# Altium PCB SZG-PMOD-TXR.PcbDoc (part 2 of 2)
Units mil, origin at the board's own origin, x right, y up, seen from the top; angles counter-clockwise.
Board outline 1968.5 x 2755.91 mil, 4 copper layers (L1-TOP, L2-GND, L3-PWR, L4-BOT), stack 59.85 mil thick; 72 components, 82 nets, 269 pads, 170 vias.
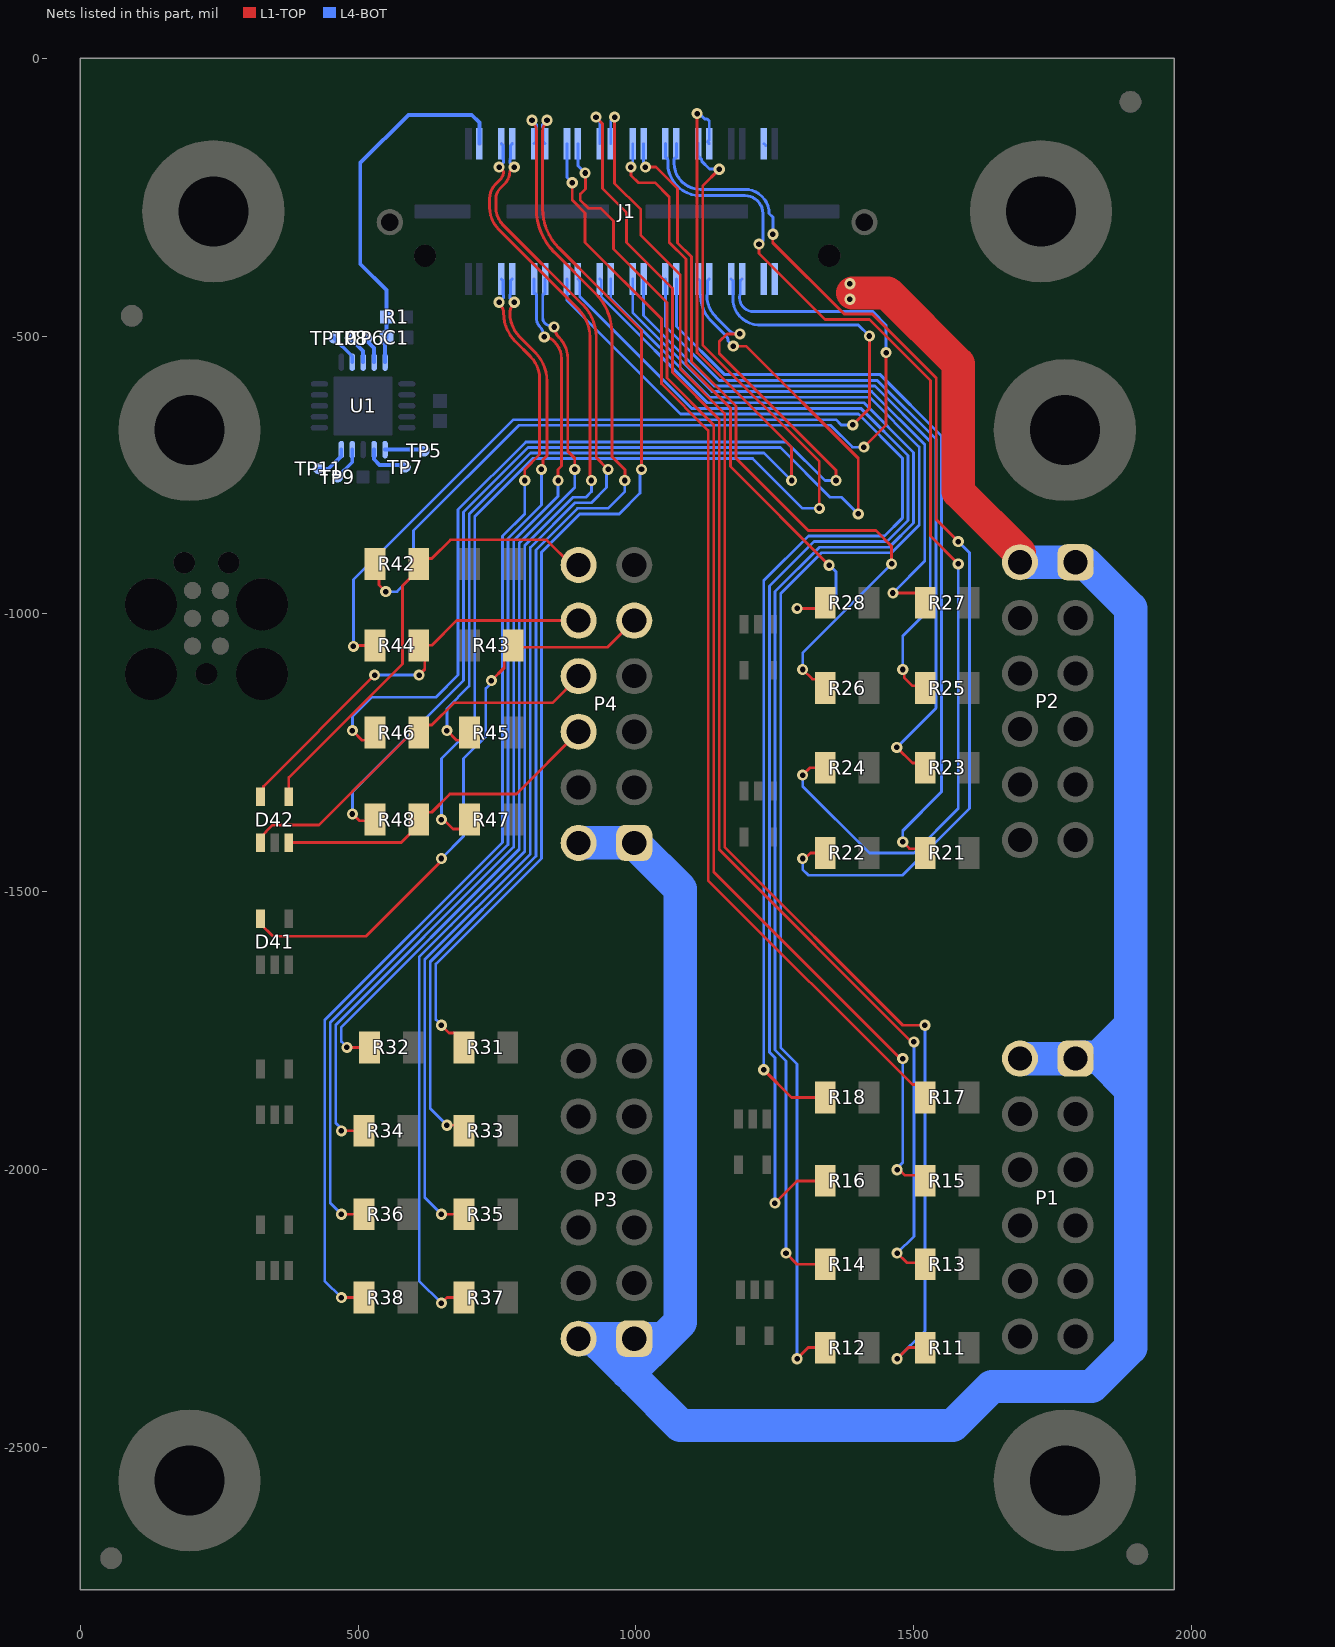
[diagram p4: the nets of this part, all layers, seen from the top]

## Via types
v1: diameter 20, hole 10, L1-TOP to L4-BOT, tented both sides, 170 vias

## Nets (pads, with @x,y where several pads share a name; then routed paths per layer and width w, separated by ;. In a path a pad name is that pad's centre, name@x,y a point inside that pad or via, vN(x,y) a via of type N, cw(c..) or ccw(c..) an arc to the next point about the centre after c; other vN are vias at no path point) (continued)
NetD41_5: D41.5 P4.9 R43.2 | length 1078.6
  L1-TOP w5: D41.5@324.41,-1548.66 324.41,-1557.52 346.89,-1580 514.06,-1580 650,-1444.06 v1(650,-1440) ; v1(740,-1120) 763.17,-1096.83 763.17,-1076.2 R43.2@779.37,-1060 ; R43.2@779.37,-1056.67 R43.2@779.37,-1060 ; P4.9@997,-1012 949,-1060 R43.2@779.37,-1060
  L4-BOT w5: v1(650,-1440) 690,-1400 690,-1260 730,-1220 730,-1134.06 740,-1124.06 v1(740,-1120)
NetD42_1: D42.1 P4.8 R46.1 | length 701.9
  L1-TOP w5: D42.1@324.41,-1411.34 324.41,-1402.48 334.63,-1392.26 334.63,-1391.5 346.13,-1380 430,-1380 586.1,-1223.9 598.8,-1223.9 R46.1@609.37,-1213.33 ; R46.1@610.83,-1214.8 625.57,-1200.06 632.64,-1200.06 672.7,-1160 850,-1160 897,-1113 P4.8@897,-1112
NetD42_3: D42.3 P4.6 R48.1 | length 608.9
  L1-TOP w5: D42.3@375.59,-1411.34 577.87,-1411.34 609.37,-1379.84 R48.1@609.37,-1370 ; R48.1@610.83,-1371.46 625.57,-1356.73 632.64,-1356.73 665.23,-1324.14 784.86,-1324.14 P4.6@897,-1212
NetD42_4: D42.4 P4.12 R42.1 | length 841.6
  L1-TOP w5: D42.4@375.59,-1328.66 375.59,-1294.41 580,-1090 580,-949.21 609.37,-919.84 609.37,-915.86 R42.1@609.37,-910 ; R42.1@610,-915.86 625.57,-900.29 632.64,-900.29 666.21,-866.72 839.18,-866.72 884.46,-912 P4.12@897,-912
NetD42_5: D42.5 P4.10 R44.1 | length 736.4
  L1-TOP w5: D42.5@324.41,-1328.66 329.78,-1323.29 329.78,-1310.22 v1(530,-1110) ; R44.1@609.37,-1056.67 620,-1067.3 620,-1099.57 610,-1109.57 v1(610,-1110) ; R44.1@609.37,-1050.63 R44.1@610,-1050 ; R44.1@625.57,-1056.48 632.64,-1056.48 677.12,-1012 P4.10@897,-1012
  L4-BOT w5: v1(530,-1110) v1(610,-1110)
NetTP5_1: TP5.1 U1.11 | length 71.3
  L4-BOT w7: U1.11@548.69,-704.42 616.68,-704.42 TP5.1@619,-706.74
NetTP6_1: TP6.1 U1.4 | length 48.6
  L4-BOT w7: TP6.1@516,-503.74 516,-508.74 529,-521.74 U1.4@529,-546.94
NetTP7_1: TP7.1 U1.12 | length 79.1
  L4-BOT w7: U1.12@529,-704.42 529,-721.74 539,-731.74 581,-731.74 TP7.1@585,-735.74
NetTP8_1: TP8.1 U1.3 | length 52.9
  L4-BOT w7: TP8.1@486,-503.74 509.32,-527.06 U1.3@509.32,-546.94
NetTP9_1: TP9.1 U1.14 | length 60.4
  L4-BOT w7: TP9.1@463,-753.74 489.63,-727.11 U1.14@489.63,-704.42
NetTP10_1: TP10.1 U1.2 | length 56.7
  L4-BOT w7: TP10.1@457,-503.74 489.63,-536.37 U1.2@489.63,-546.94
NetTP11_1: TP11.1 U1.15 | length 61.8
  L4-BOT w7: TP11.1@429,-738.74 447,-738.74 469.94,-715.8 U1.15@469.94,-704.42
P2C_CLKN: J1.35 R42.2 | length 1665.1
  L1-TOP w5: R42.2@530.63,-910 537.63,-917 537.63,-947.63 v1(550,-960) ; v1(1410,-700) 1450,-660 v1(1450,-530)
  L4-BOT w5: v1(550,-960) 570,-960 600,-930 600,-850 789.5,-660.5 1350,-660.5 1389.5,-700 v1(1410,-700)
  L4-BOT w5.25: J1.35@1190.94,-397.24 1187.66,-400.52 1187.66,-425.3 1186.73,-426.24 ccw(c1211.85,-430.62) 1211.72,-456.12 1426.12,-456.12 1450,-480 v1(1450,-530)
P2C_CLKP: J1.33 R44.2 | length 1673.6
  L1-TOP w5: v1@490,-1060 v1(491.67,-1058.33) 493.33,-1056.67 R44.2@530.63,-1056.67 ; v1(1390,-660) 1420,-630 v1(1420,-500)
  L4-BOT w5: v1(491.67,-1058.33) 491.67,-938.33 779.5,-650.5 1360,-650.5 1369.5,-660 v1(1390,-660)
  L4-BOT w5.25: J1.33@1171.26,-397.24 1174.54,-400.52 1174.54,-423.16 1174.54,-437.99 1174.54,-438.35 ccw(c1222.1,-432.02) 1219.92,-479.96 1219.99,-479.96 1399.96,-479.96 v1(1420,-500)
R_GA: C1.2 J1.4 R1.1 U1.5 | length 672.1
  L4-BOT w7: U1.5@548.69,-546.94 C1.2@548.69,-503.34 ; R1.1@550.69,-466.34 R1.1@551.18,-465.84 ; C1.2@550.89,-503 551.18,-502.71 R1.1@551.18,-465.84 ; R1.1@551.28,-465.74 R1.1@551.18,-465.84 ; J1.4@718.5,-153.94 718.5,-116.14 704.72,-102.36 590.55,-102.36 503.94,-188.98 503.94,-370.08 551.18,-417.32 R1.1@551.18,-465.84
REFCLKN: J1.15 R16.2 | length 2378.6
  L1-TOP w5: v1(1250,-2060) 1290,-2020 R16.2@1340.63,-2020
  L4-BOT w5.25: J1.15@895.67,-397.24 898.95,-400.52 898.95,-428.95 1100.13,-630.12 1404.62,-630.12 1489.5,-715 1489.5,-832.04 1451.66,-869.88 1320.13,-869.88 1240.25,-949.75 1240.25,-1788.71 1250,-1798.46 v1(1250,-2060)
REFCLKP: J1.13 R18.2 | length 2174.9
  L1-TOP w5: v1(1230,-1820) 1280,-1870 R18.2@1340.63,-1870
  L4-BOT w5.25: J1.13@875.98,-397.24 875.98,-435.98 1080.38,-640.38 1400.38,-640.38 1479.25,-719.25 1479.25,-827.79 1447.42,-859.62 1310.38,-859.62 1230,-940 v1(1230,-1820)
RSVD_37: J1.37
RSVD_38: J1.38 | length 4.8
  L4-BOT w5: J1.38@1230.32,-153.94 J1.38@1233.72,-157.34
RX0N: J1.7 R36.2 | length 1922.3
  L1-TOP w5: v1(470,-2080) R36.2@510.63,-2080
  L1-TOP w5.25: v1(781,-439.31) cw(c774.78,-439.31) 779.18,-443.7 ccw(c793.79,-458.32) 773.13,-458.32 ccw(c834.53,-458.32) 791.11,-501.74 818.06,-528.69 cw(c765.1,-581.66) 840,-581.66 840,-715.51 832.82,-722.69 832.82,-737.18 v1(830,-740)
  L4-BOT w5: v1(470,-2080) 450,-2060 450,-1735.15 770,-1415.15 770,-864.14 830,-804.14 v1(830,-740)
  L4-BOT w5.25: J1.7@777.56,-397.24 774.28,-400.52 774.28,-425.15 773.13,-426.31 773.13,-431.43 v1(781,-439.31)
RX0P: J1.5 R38.2 | length 2074.4
  L1-TOP w5: v1(470,-2230) R38.2@510.63,-2230
  L1-TOP w5.25: v1(754,-439.31) ccw(c760.22,-439.31) 755.82,-443.7 cw(c741.21,-458.32) 761.88,-458.32 761.88,-458.38 ccw(c834.38,-458.38) 783.11,-509.65 810.03,-536.57 cw(c769.61,-576.99) 826.77,-576.99 826.77,-713.23 800,-740 v1(800,-760)
  L4-BOT w5: v1(470,-2230) 440,-2200 440,-1731.01 760,-1411.01 760,-860 800,-820 v1(800,-760)
  L4-BOT w5.25: v1(754,-439.31) 761.88,-431.43 761.88,-426.31 761.15,-425.59 761.15,-400.52 J1.5@757.87,-397.24
RX1N: J1.11 R32.2 | length 1628.5
  L1-TOP w5: v1(480,-1780) R32.2@520.63,-1780
  L1-TOP w5.25: v1(852.79,-483.82) cw(c846.69,-489.92) 855.32,-489.92 ccw(c870.16,-489.92) 859.67,-500.42 861.3,-502.05 cw(c822.46,-540.89) 877.39,-540.89 877.39,-707.39 890,-720 v1(890,-740)
  L4-BOT w5: v1(480,-1780) 480,-1779.57 470,-1769.57 470,-1743.43 790,-1423.43 790,-872.43 890,-772.43 v1(890,-740)
  L4-BOT w5.25: J1.11@836.61,-397.24 836.61,-423.23 ccw(c836.61,-427.45) 832.4,-427.45 832.4,-467.38 ccw(c846.3,-467.38) 836.47,-477.22 ccw(c846.3,-467.38) 846.3,-481.29 846.69,-481.29 cw(c846.69,-489.92) v1(852.79,-483.82)
RX1P: J1.9 R34.2 | length 1767.5
  L1-TOP w5: v1(470,-1930) R34.2@510.63,-1930
  L1-TOP w5.25: v1(835.12,-501.5) ccw(c841.22,-495.39) 841.22,-504.03 cw(c841.22,-518.87) 851.71,-508.37 853.27,-509.92 cw(c822.18,-541.01) 866.14,-541.01 866.14,-733.86 860,-740 v1(860,-760)
  L4-BOT w5: v1(470,-1930) 470,-1925.94 460,-1915.94 460,-1739.29 780,-1419.29 780,-868.28 860,-788.28 v1(860,-760)
  L4-BOT w5.25: J1.9@816.93,-397.24 816.93,-423.23 cw(c816.93,-427.45) 821.15,-427.45 821.15,-467.77 ccw(c845.37,-467.77) 828.24,-484.9 cw(c817.75,-495.39) 832.59,-495.39 ccw(c841.22,-495.39) v1(835.12,-501.5)
RX2N: J1.31 R46.2 | length 1868.1
  L1-TOP w5: v1(490,-1210) 507.36,-1227.36 516.61,-1227.36 R46.2@530.63,-1213.33 ; 1150,-531.54 1150,-510 1163.72,-496.28 v1(1186.94,-496.28)
  L1-TOP w5.25: 1150,-531.54 1360,-741.54 v1(1360,-760)
  L4-BOT w5: v1(490,-1210) 490,-1184.06 524.06,-1150 640,-1150 680,-1110 680,-812.43 801.93,-690.5 1270.5,-690.5 1340,-760 v1(1360,-760)
  L4-BOT w5.25: J1.31@1131.89,-397.24 1128.61,-400.52 1128.61,-425.3 1127.67,-426.24 1127.67,-427.26 ccw(c1181.41,-427.26) 1143.41,-465.26 1170.78,-492.63 ccw(c1177.17,-486.22) 1177.17,-495.27 1179.15,-495.27 cw(c1179.15,-504.9) v1@1185.61,-497.75 ; v1@1185.96,-498.09 ccw(c1179.15,-504.9) v1@1185.61,-497.75 ; v1(1186.94,-496.28) 1186.94,-496.42 v1@1185.61,-497.75
RX2P: J1.29 R48.2 | length 2033
  L1-TOP w5: v1(490,-1360) 490.43,-1360 502.59,-1372.16 528.47,-1372.16 R48.2@530.63,-1370 ; v1(1175.11,-518.3) 1198.3,-518.3 1400,-720 v1(1400,-820)
  L4-BOT w5: v1(490,-1360) 490,-1320 690,-1120 690,-816.57 806.07,-700.5 1260,-700.5 1349.5,-790 1370,-790 v1(1400,-820) ; v1@1174.81,-518.3 v1(1175.11,-518.3)
  L4-BOT w5.25: J1.29@1112.2,-397.24 1115.49,-400.52 1115.49,-425.3 1116.42,-426.24 1116.42,-427.33 ccw(c1181.25,-427.33) 1135.41,-473.17 1162.81,-500.57 cw(c1156.41,-506.97) 1165.46,-506.97 1165.46,-508.96 v1@1174.81,-518.3
RX3N: J1.27 R21.1 | length 1452.3
  L1-TOP w5: v1(1480,-1410) 1492.37,-1422.37 1513,-1422.37 R21.1@1520.63,-1430
  L4-BOT w5.25: J1.27@1072.83,-397.24 1072.83,-482.83 1159.63,-569.62 1439.63,-569.62 1550,-680 1550,-1320 1480,-1390 v1(1480,-1410)
RX3P: J1.25 R23.1 | length 1306.8
  L1-TOP w5: v1(1469.19,-1240.19) 1497.36,-1268.35 1512.31,-1268.35 R23.1@1520.63,-1276.67
  L4-BOT w5.25: J1.25@1053.15,-397.24 1053.15,-483.15 1149.88,-579.88 1434.19,-579.88 1539.75,-685.43 1539.75,-1169.63 v1(1469.19,-1240.19)
S0: J1.14 R17.1 | length 1987.2
  L1-TOP w5: v1(885.36,-224.23) 885.36,-255.36 908.46,-278.46 908.46,-331.58 1045.79,-468.9 1045.79,-585.79 1130,-670 1130,-1479.37 1497.36,-1846.73 1504.43,-1846.73 1520.63,-1862.93 R17.1@1520.63,-1870
  L4-BOT w5: J1.14@875.98,-153.94 875.98,-214.86 v1(885.36,-224.23)
S1: J1.16 R15.1 | length 2174.4
  L1-TOP w5: v1(908.67,-206.77) 909.04,-207.13 909.04,-235.48 900,-244.52 900,-255.86 914.14,-270 936.34,-270 959.65,-293.31 959.65,-343.5 1055.79,-439.65 1055.79,-575.79 1140,-660 1140,-1464.62 1470.32,-1794.94 1470.88,-1794.94 1475.94,-1800 v1(1480,-1800) ; v1(1470,-2000) 1474.06,-2000 1484.06,-2010 1510.63,-2010 R15.1@1520.63,-2020
  L4-BOT w5: J1.16@895.67,-153.94 895.67,-193.77 v1(908.67,-206.77) ; v1(1470,-2000) 1470,-1996.7 1480,-1986.7 v1(1480,-1800)
S2: J1.17 R14.2 | length 2415.7
  L1-TOP w5: v1(1270,-2150) 1290,-2170 R14.2@1340.63,-2170
  L4-BOT w5: J1.17@935.04,-397.24 937.79,-400 937.79,-429.55 1128.25,-620 1410,-620 1499.63,-709.62 1499.63,-836.23 1455.86,-880 1330,-880 1250.38,-959.62 1250.38,-1784.52 1270,-1804.14 v1(1270,-2150)
S3: J1.18 R13.1 | length 2404.9
  L1-TOP w5: v1(928.15,-106.3) 939.96,-118.11 939.96,-234.66 983.27,-277.97 983.27,-331.69 1065.79,-414.21 1065.79,-565.79 1150,-650 1150,-1424.06 1495.94,-1770 v1(1500,-1770) ; v1(1470,-2150) 1487.36,-2167.36 1517.99,-2167.36 R13.1@1520.63,-2170
  L4-BOT w5: v1(928.15,-106.3) 935.04,-113.19 J1.18@935.04,-153.94 ; v1(1470,-2150) 1500.19,-2119.81 1500.19,-1770.19 v1(1500,-1770)
S4: J1.19 R12.2 | length 2589.2
  L1-TOP w5: v1(1290,-2340) 1310,-2320 R12.2@1340.63,-2320
  L4-BOT w5: J1.19@954.72,-397.24 954.72,-432.33 1132.39,-610 1420,-610 1509.63,-699.62 1509.63,-840.38 1460,-890 1334.14,-890 1260.38,-963.77 1260.38,-1780.37 1290,-1810 v1(1290,-2340)
S5: J1.20 R11.1 | length 2618.5
  L1-TOP w5: v1(961.61,-106.3) 961.61,-225.39 1008.86,-272.64 1008.86,-318.9 1079.88,-389.91 1079.88,-559.87 1160,-640 1160,-1419.92 1480.08,-1740 v1(1520,-1740) ; v1(1470,-2340) 1490,-2320 R11.1@1520.63,-2320
  L4-BOT w5: J1.20@954.72,-153.94 954.72,-113.19 v1(961.61,-106.3) ; v1(1470,-2340) 1520,-2290 v1(1520,-1740)
S6: J1.21 R27.1 | length 1041.4
  L1-TOP w5: v1(1462.37,-962.37) 1504.43,-962.37 1520.63,-978.58 R27.1@1520.63,-980
  L4-BOT w5: J1.21@994.09,-397.24 994.09,-457.56 1136.53,-600 1424.14,-600 1519.63,-695.48 1519.63,-905.12 v1(1462.37,-962.37)
S7: J1.22 R28.2 | length 1127
  L1-TOP w5: v1(991.07,-196) 991.07,-211.07 1004.11,-224.11 1034.11,-224.11 1060,-250 1060,-331.65 1089.88,-361.53 1089.88,-549.88 1170,-630 1170,-734.75 v1(1347.63,-912.37) ; v1(1290,-990) 1330.63,-990 R28.2@1340.63,-980
  L4-BOT w5: v1(991.07,-196) 994.09,-192.98 J1.22@994.09,-153.94 ; v1(1290,-990) 1350,-990 1360,-980 1360,-924.06 1348.32,-912.37 v1(1347.63,-912.37)
S8: J1.23 R25.1 | length 1168
  L1-TOP w5: v1(1480,-1100) 1482.87,-1102.87 1482.87,-1114.93 1497.36,-1129.42 1516.72,-1129.42 R25.1@1520.63,-1133.33
  L4-BOT w5: J1.23@1013.78,-397.24 1013.78,-463.11 1140.67,-590 1430,-590 1529.63,-689.62 1529.63,-990.38 1480,-1040 v1(1480,-1100)
S9: J1.24 R26.2 | length 1334
  L1-TOP w5: v1(1017.07,-196) 1036,-196 1074.88,-234.88 1074.88,-332.39 1099.88,-357.39 1099.88,-545.73 1180,-625.86 1180,-720 1310,-850 1431.79,-850 1460,-878.21 v1(1460,-910) ; v1(1300,-1100) 1317.36,-1117.36 1324.65,-1117.36 R26.2@1340.63,-1133.33
  L4-BOT w5: J1.24@1013.78,-153.94 1013.78,-192.71 v1(1017.07,-196) ; v1(1300,-1100) 1300,-1070 v1(1460,-910)
TX0N: J1.8 R35.1 | length 2227.4
  L1-TOP w5: v1(650,-2080) R35.1@690.63,-2080
  L1-TOP w5.25: v1(781,-196) 773,-204 cw(c740.84,-204) 763.58,-226.74 755.49,-234.83 ccw(c773.51,-252.84) 748.03,-252.84 748.03,-268.61 ccw(c793.4,-268.61) 761.32,-300.69 904.15,-443.52 cw(c845.18,-502.49) 928.57,-502.49 928.57,-718.57 v1(950,-740)
  L4-BOT w5: v1(650,-2080) 620,-2050 620,-1621.72 810,-1431.72 810,-880.71 890.71,-800 920,-800 947.25,-772.75 947.25,-742.75 v1(950,-740)
  L4-BOT w5.25: J1.8@777.56,-153.94 774.28,-157.22 774.28,-181.85 773.13,-183 773.13,-188.12 v1(781,-196)
TX0P: J1.6 R37.1 | length 2375.8
  L1-TOP w5: v1(650,-2240) 660,-2230 R37.1@690.63,-2230
  L1-TOP w5.25: v1(754,-196) 761.75,-203.75 cw(c740.24,-203.75) 755.45,-218.96 747.52,-226.89 ccw(c773.45,-252.82) 736.78,-252.82 736.78,-268.66 ccw(c793.28,-268.66) 753.33,-308.61 896.08,-451.36 cw(c844.8,-502.64) 917.32,-502.64 917.32,-757.32 v1(920,-760)
  L4-BOT w5: v1(650,-2240) 610,-2200 610,-1617.57 667.57,-1560 800,-1427.57 800,-876.57 886.57,-790 910,-790 920,-780 v1(920,-760)
  L4-BOT w5.25: v1(754,-196) 761.88,-188.12 761.88,-183 761.15,-182.28 761.15,-157.22 J1.6@757.87,-153.94
TX1N: J1.12 R31.1 | length 2008.7
  L1-TOP w5: v1(650,-1740) 663.96,-1753.96 674.43,-1753.96 690.63,-1770.16 R31.1@690.63,-1780
  L1-TOP w5.25: v1(840.06,-111.87) cw(c833.84,-111.87) 838.23,-116.27 ccw(c852.85,-130.89) 832.18,-130.89 832.18,-271.1 ccw(c931.57,-271.1) 861.29,-341.38 935.45,-415.54 1010,-490.09 v1(1010,-740)
  L4-BOT w5: v1(650,-1740) 650,-1739.57 640,-1729.57 640,-1630 830,-1440 830,-888.99 898.99,-820 970,-820 1007.25,-782.75 1007.25,-742.75 v1(1010,-740)
  L4-BOT w5.25: J1.12@836.61,-153.94 833.33,-150.66 833.33,-126.03 832.18,-124.87 832.18,-119.75 v1(840.06,-111.87)
TX1P: J1.10 R33.1 | length 2138.5
  L1-TOP w5: v1(660,-1920) 680.63,-1920 R33.1@690.63,-1930
  L1-TOP w5.25: v1(813.06,-111.87) ccw(c819.27,-111.87) 814.88,-116.27 cw(c800.26,-130.89) 820.93,-130.89 820.93,-271.14 ccw(c931.48,-271.14) 853.31,-349.31 927.4,-423.4 cw(c856.69,-494.11) 956.69,-494.11 956.69,-716.69 980,-740 v1(980,-760)
  L4-BOT w5: v1(660,-1920) 630,-1890 630,-1625.86 820,-1435.86 820,-884.85 894.85,-810 950,-810 980,-780 v1(980,-760)
  L4-BOT w5.25: v1(813.06,-111.87) 820.93,-119.75 820.93,-124.87 820.21,-125.59 820.21,-150.66 J1.10@816.93,-153.94
TX2N: J1.32 R45.1 | length 1906.8
  L1-TOP w5: v1(660,-1210) 677.36,-1227.36 686.61,-1227.36 R45.1@700.63,-1213.33 ; 1110,-530 1280,-700 v1(1280,-760)
  L1-TOP w5.25: 1110,-530 v1(1110,-100)
  L4-BOT w5: v1(660,-1210) 660,-1170 700,-1130 700,-820.71 810.21,-710.5 1230.5,-710.5 v1(1280,-760)
  L4-BOT w5.25: v1(1110,-100) 1113.99,-100 1123.67,-109.68 1128.18,-109.68 1131.89,-113.39 1131.89,-147.38 1128.61,-150.66 J1.32@1131.89,-153.94
TX2P: J1.30 R47.1 | length 2116.5
  L1-TOP w5: v1(650,-1370) 654.06,-1370 670.99,-1386.93 684.43,-1386.93 700.63,-1370.73 R47.1@700.63,-1370 ; v1(1150,-200) 1120.13,-229.88 1120.13,-515.98 1330,-725.86 v1(1330,-810)
  L4-BOT w5: v1(650,-1370) 650,-1260 710,-1200 710,-824.85 814.35,-720.5 1210,-720.5 1299.5,-810 v1(1330,-810)
  L4-BOT w5.25: J1.30@1112.2,-153.94 1112.2,-176.57 1118.36,-182.73 1118.36,-185.64 1132.13,-199.4 1149.4,-199.4 v1(1150,-200)
TX3N: J1.28 R22.2 | length 1928.2
  L1-TOP w5: v1(1300,-1440) 1304.06,-1440 1314.06,-1430 R22.2@1340.63,-1430 ; 1540.25,-580.86 1540.25,-830.25 v1(1580,-870)
  L1-TOP w5.25: v1(1246.47,-317.02) 1246.2,-329.93 1246.2,-332.16 1374.18,-460.14 1424.63,-460.14 1540.25,-575.75 1540.25,-580.86
  L4-BOT w5: v1(1300,-1440) 1300,-1460 1310,-1470 1480,-1470 1600,-1350 1600,-890 v1(1580,-870)
  L4-BOT w5.25: J1.28@1072.83,-153.94 1072.83,-179.13 ccw(c1072.83,-183.35) 1068.62,-183.35 1068.62,-188.98 ccw(c1115.86,-188.98) 1115.86,-236.22 1196.29,-236.22 cw(c1196.29,-279.53) 1239.6,-279.53 1246.47,-286.4 v1(1246.47,-317.02)
TX3P: J1.26 R24.2 | length 1958.9
  L1-TOP w5: v1(1300,-1290) 1313.33,-1276.67 R24.2@1340.63,-1276.67 ; 1530,-830 1530,-860 v1(1580,-910)
  L1-TOP w5.25: v1(1221.47,-334.65) 1221.47,-351.47 1340.39,-470.39 1420.39,-470.39 1530,-580 1530,-830
  L4-BOT w5: v1(1300,-1290) 1300,-1310 1420,-1430 1500,-1430 1580,-1350 v1(1580,-910)
  L4-BOT w5.25: J1.26@1053.15,-153.94 1053.15,-179.13 cw(c1053.15,-183.35) 1057.37,-183.35 1057.37,-188.98 ccw(c1115.86,-188.98) 1115.86,-247.47 1196.29,-247.47 cw(c1196.29,-279.53) 1228.35,-279.53 1228.35,-327.77 cw(c1221.47,-327.77) v1(1221.47,-334.65)
VIO: J1.39 P1.1 P1.2 P2.1 P2.2 P3.1 P3.2 P4.1 P4.2 | length 4903.5
  L1-TOP w60: 1389.76,-422.51 1452.51,-422.51 1580,-550 1580,-780 1690.05,-890.05 1690.05,-906.05 P2.2@1691,-907 ; P1.1@1791,-1800 P1.1@1793.48,-1797.52 ; P2.1@1791,-907 P2.1@1793.48,-909.48
  L4-BOT w60: P3.2@897,-2304 935.63,-2304 P3.1@997,-2304 ; P4.2@897,-1412 P4.1@997,-1412 1080,-1495 1080,-2274.11 1046,-2308.11 997,-2357.11 ; 935.63,-2315.62 984.38,-2364.37 ; 1046.48,-2304 P3.1@997,-2304 ; P1.2@1691,-1800 P1.1@1791,-1800 ; P2.2@1691,-907 P2.1@1791,-907 ; P1.1@1793.48,-1797.52 1832.48,-1797.52 ; P2.1@1793.48,-909.48 1809.48,-909.48 1890,-990 1890,-1740 ; 1840,-1790 1832.48,-1797.52 ; 1841.25,-1788.75 1890,-1740 ; 997,-2357.11 P3.1@997,-2304 ; 997,-2357.11 997,-2377 1080,-2460 1570,-2460 1640,-2390 1820,-2390 1890,-2320 1890,-1855.04 ; 1832.48,-1797.52 1890,-1855.04 ; 1890,-1855.04 1890,-1740
  other v1: 1384.99,-433.95 1384.99,-405.95
pads on no net: FID1.FID? FID2.FID? FID3.FID? FID4.FID? FID5.FID? FID6.FID? FID7.FID? FID8.FID? J1.MH J2.A J2.B J2.C J2.D J2.E J2.F J2.G MH1.1 MH2.1 MH3.1 MH4.1 MH5.1 MH6.1 U1.6 U1.7 U1.10 U1.17 U1.18 U1.19

## Polygon pours and split planes (outlines as drawn)
GND on L3-PWR "L3_Ground" (solid, pour order 6): 21.65,-2734.25 21.65,-21.65 1946.85,-21.65 1946.85,-2734.25
+3.3V on L3-PWR "L3_+3.3V" (solid, pour order 4): 672,-733.51 672,-630 672,-470 736.22,-405.78 736.22,-264.22 672,-200 573,-200 488.5,-284.5 488.5,-383.5 429,-443 429,-795 610.51,-795
VIO on L4-BOT "L4_VIO" (solid, remove dead copper, pour order 7): 1244.09,-368.11 1332.68,-368.11 1352.36,-387.8 1388.78,-387.8 1398.62,-397.64 1398.62,-440.94 1390.75,-448.82 1324.8,-448.82 1303.15,-427.17 1244.09,-427.17
GND on L2-GND (split plane): 1948.41,-2735.81 20.1,-2735.81 20.1,-20.1 1948.41,-20.1

## Other copper
L4-BOT:
  rectangle net VIO: 1244.09,-427.17 1312.99,-368.11
  region net +5V: 703.82,-126.13 610.24,-126.13 610.24,-182.13 703.82,-182.13
  rectangle net +3.3V: 1245,-181.74 1282,-125.74
  region net GND: 1267,-263.74 1366,-263.74 1366,-314.74 1267,-314.74
  region net GND: 1018,-263.74 1201,-263.74 1201,-314.74 1018,-314.74
  region net GND: 768,-263.74 951,-263.74 951,-314.74 768,-314.74
  region net GND: 768,-263.74 951,-263.74 951,-314.74 768,-314.74
  region net GND: 1018,-263.74 1201,-263.74 1201,-314.74 1018,-314.74
  region net GND: 1267,-263.74 1366,-263.74 1366,-314.74 1267,-314.74
  region net GND: 603,-263.74 603,-314.74 701,-314.74 701,-263.74

## Silkscreen, mask and mechanical layers (free items; w line width, h text height)
Top Overlay:
  lines w5: 130,-2422 130,-1835 ; 130,-1770 130,-1170 ; 360,-2635 960,-2635 ; 1025,-2635 1625,-2635 ; 54,-2325 54,-2235 204,-2235 204,-2325 54,-2325 ; 54,-2035 54,-1935 204,-1935 204,-2035 54,-2035 ; 54,-1670 54,-1570 204,-1570 204,-1670 54,-1670 ; 54,-1370 54,-1270 204,-1270 204,-1370 54,-1370 ; 55,-2135 55,-2035 205,-2035 205,-2135 55,-2135 ; 55,-1935 55,-1835 205,-1835 205,-1935 55,-1935 ; 55,-1470 55,-1370 205,-1370 205,-1470 55,-1470 ; 55,-1270 55,-1177 205,-1177 205,-1270 55,-1270 ; 56,-2235 56,-2135 206,-2135 206,-2235 56,-2235 ; 56,-1570 56,-1470 206,-1470 206,-1570 56,-1570 ; 360,-2710 460,-2710 460,-2560 360,-2560 360,-2710 ; 460,-2711 560,-2711 560,-2561 460,-2561 460,-2711 ; 560,-2710 660,-2710 660,-2560 560,-2560 560,-2710 ; 660,-2709 760,-2709 760,-2559 660,-2559 660,-2709 ; 760,-2711 860,-2711 860,-2561 760,-2561 760,-2711 ; 1025,-2710 1125,-2710 1125,-2560 1025,-2560 1025,-2710 ; 1125,-2711 1225,-2711 1225,-2561 1125,-2561 1125,-2711 ; 1225,-2710 1325,-2710 1325,-2560 1225,-2560 1225,-2710 ; 1325,-2709 1425,-2709 1425,-2559 1325,-2559 1325,-2709 ; 1425,-2711 1525,-2711 1525,-2561 1425,-2561 1425,-2711
  lines w10: 55,-2420 55,-1835 205,-1835 205,-2420 55,-2420 ; 55,-1770 55,-1177 205,-1177 205,-1770 55,-1770 ; 360,-2710 960,-2710 960,-2560 360,-2560 360,-2710 ; 680,-740 1415,-740 1415,-535 680,-535 680,-740 ; 1025,-2710 1625,-2710 1625,-2560 1025,-2560 1025,-2710
  lines w10.5: 857.4,-226 857.5,-226 ; 868.5,-232.5 890,-245 ; 890,-283 890.1,-283 ; 890,-270 890,-245 ; 911.5,-232.5 890,-245 ; 922.9,-226 923,-226
  text "PXL Digital" at 185,-145 h30
  text "Miguel Nunez 2024" at 1330,-145 h30
  text "v 1.0" at 1485,-200 h30
  text "SYZYGY" at 944,-275 h40
  text "PMOD SHIELD" at 769,-431 h39.37
  text "ATTENTION" at 851,-614 h45
  text "VIO ALWAYS 3.3V" at 725,-710 h45
  text "1" at 59,-1154 h15 r270
  text "2" at 220,-1179 h15 r270
  text "VIO" at 84,-1209 h15 r270
  text "VIO" at 159,-1209 h15 r270
  text "GND" at 84,-1304 h15 r270
  text "GND" at 159,-1304 h15 r270
  text "PMOD 3" at 220,-1350 h45 r270
  text "RX0P" at 159,-1389 h15 r270
  text "TX0P" at 84,-1394 h15 r270
  text "RX0N" at 159,-1489 h15 r270
  text "TX0N" at 84,-1494 h15 r270
  text "PMOD 4" at 850,-1555 h35
  text "PMOD 2" at 1645,-1555 h35
  text "TX1P" at 84,-1599 h15 r270
  text "RX1P" at 159,-1599 h15 r270
  text "TX1N" at 84,-1694 h15 r270
  text "RX1N" at 159,-1694 h15 r270
  text "PMOD 3" at 850,-1695 h35
  text "PMOD 1" at 1645,-1695 h35
  text "11" at 59,-1784 h15 r270
  text "12" at 189,-1784 h15 r270
  text "2" at 218,-1838 h15 r270
  text "1" at 30,-1841 h15 r270
  text "VIO" at 84,-1869 h15 r270
  text "VIO" at 156.5,-1869 h15 r270
  text "GND" at 84,-1964 h15 r270
  text "GND" at 156.5,-1964 h15 r270
  text "PMOD 4" at 220,-2010 h45 r270
  text "P2C_CLKP" at 158.17,-2044 h10 r270
  text "TX2P" at 84,-2059 h15 r270
  text "P2C_CLKP" at 158.17,-2144 h10 r270
  text "TX2N" at 84,-2159 h15 r270
  text "C2P_CLKP" at 90.67,-2242 h10 r270
  text "TX3N" at 156.5,-2254 h15 r270
  text "C2P-CLKN" at 89,-2334 h10 r270
  text "TX3P" at 159,-2344 h15 r270
  text "12" at 214,-2399 h15 r270
  text "11" at 59,-2434 h15 r270
  text "PMOD 1" at 540,-2545 h45
  text "PMOD 2" at 1200,-2545 h45
  text "12" at 334,-2551 h15
  text "2" at 1609,-2551 h15
  text "2" at 974,-2576 h15
  text "12" at 994,-2576 h15
  text "REFCLKN" at 579,-2603.5 h10
  text "REFCLKP" at 679,-2603.5 h10
  text "S4" at 399,-2606 h15
  text "S2" at 499,-2606 h15
  text "GND" at 789,-2606 h15
  text "VIO" at 889,-2606 h15
  text "TX3N" at 1049,-2608.5 h15
  text "TX3P" at 1149,-2608.5 h15
  text "S9" at 1264,-2608.5 h15
  text "S7" at 1364,-2608.5 h15
  text "GND" at 1454,-2608.5 h15
  text "VIO" at 1554,-2608.5 h15
  text "S5" at 399,-2681 h15
  text "S3" at 499,-2681 h15
  text "S1" at 599,-2681 h15
  text "S0" at 699,-2681 h15
  text "GND" at 789,-2681 h15
  text "VIO" at 889,-2681 h15
  text "RX3N" at 1049,-2681 h15
  text "RX3P" at 1149,-2681 h15
  text "S8" at 1264,-2681 h15
  text "S6" at 1364,-2681 h15
  text "GND" at 1454,-2681 h15
  text "VIO" at 1554,-2681 h15
  text "11" at 334,-2706 h15
  text "1" at 974,-2706 h15
  text "11" at 999,-2706 h15
  text "1" at 1639,-2706 h15
Outline:
  the board outline again, w10
Mechanical:
  lines w7.87: 0,-472.44 1968.5,-472.44
  text "Carrier board edge" at 551.18,-551.18 h50
Fab Notes:
Doc-Assy-Top:
  lines w2.11: -1121.8,-2419.19 -1037.36,-2419.19 ; -1121.8,-1521.95 -1037.36,-1521.95 ; -1121.8,-624.71 -1037.36,-624.71 ; 251.41,-1704.95 335.86,-1704.95 ; 1116.03,-3231.99 1116.03,-3147.54 ; 1116.03,103.64 1116.03,188.09 ; 3269.41,-2419.19 3353.86,-2419.19 ; 3269.41,-624.71 3353.86,-624.71
  text "2" at 525.75,132.42 h29.56
  text "3" at 1684.77,132.42 h29.56
  text "A" at -1091.46,-214.3 h29.56
  text "A" at 3302.41,-214.3 h29.56
  text "B" at -1091.46,-1111.54 h29.56
  text "B" at 3302.41,-1111.54 h29.56
  text "C" at -1091.46,-2008.78 h29.56
  text "C" at 3302.41,-2008.78 h29.56
Doc-Assy-Bot:
  lines w2.11: -1122,-2419.35 -1037.57,-2419.35 ; -1122,-1522.27 -1037.57,-1522.27 ; -1122,-625.19 -1037.57,-625.19 ; 250.42,-1705.27 334.85,-1705.27 ; 1115.43,-3232 1115.43,-3147.57 ; 1115.43,103.03 1115.43,187.46 ; 3268.42,-2419.35 3352.85,-2419.35 ; 3268.42,-625.19 3352.85,-625.19
  text "3" at 546.78,131.8 h29.55
  text "2" at 1705.6,131.8 h29.55
  text "A" at -1070.56,-214.85 h29.55
  text "A" at 3322.52,-214.85 h29.55
  text "B" at -1070.56,-1111.93 h29.55
  text "B" at 3322.52,-1111.93 h29.55
  text "C" at -1070.56,-2009.01 h29.55
  text "C" at 3322.52,-2009.01 h29.55

## Dimensions
0,-2755.91 to 1771.65,-2559.06 on MTG Locations
196.85,-2559.06 to 0,-2755.91 on MTG Locations
196.85,-2559.06 to 0,-2755.91 on MTG Locations
239.76,-275.59 to 0,0 on MTG Locations
239.76,-275.59 to 1728.74,-275.59 on MTG Locations
196.85,-669.29 to 0,0 on MTG Locations
239.76,-275.59 to 0,0 on MTG Locations
0,0 to 0,-2755.91 on Dimensions
0,0 to 1968.5,0 on Dimensions

## Text inside footprints (layer, text, board x,y; h text height)
P1: Top Overlay "12" at 1707.5,-2399.96 h20 r90; Top Overlay "11" at 1809.87,-2399.96 h20 r90; Top Overlay "2" at 1709.5,-1747.64 h20 r90; Top Overlay "1" at 1811.87,-1747.64 h20 r90
P2: Top Overlay "1" at 1811.87,-854.64 h20 r90; Top Overlay "2" at 1709.5,-854.64 h20 r90; Top Overlay "12" at 1709.5,-1501.96 h20 r90; Top Overlay "11" at 1811.87,-1501.96 h20 r90
P3: Top Overlay "12" at 911.57,-1735.89 h20 r90; Top Overlay "11" at 1017.87,-1735.89 h20 r90; Top Overlay "1" at 1017.87,-2387.86 h20 r90; Top Overlay "2" at 913,-2394 h20 r90
P4: Top Overlay "12" at 911.57,-843.89 h20 r90; Top Overlay "11" at 1017.87,-843.89 h20 r90; Top Overlay "1" at 1017.87,-1495.86 h20 r90; Top Overlay "2" at 911.57,-1507.67 h20 r90